# Altium PCB УШЯИ.411618.029Э.pcbdoc (part 3 of 6)
Units mil, origin at the board's own origin, x right, y up, seen from the top; angles counter-clockwise.
Board outline 13385.8 x 6692.9 mil, 4 copper layers (Top Layer, Supply, GND, Bottom Layer), stack 62.3 mil thick; 637 components, 474 nets, 1978 pads, 458 vias.
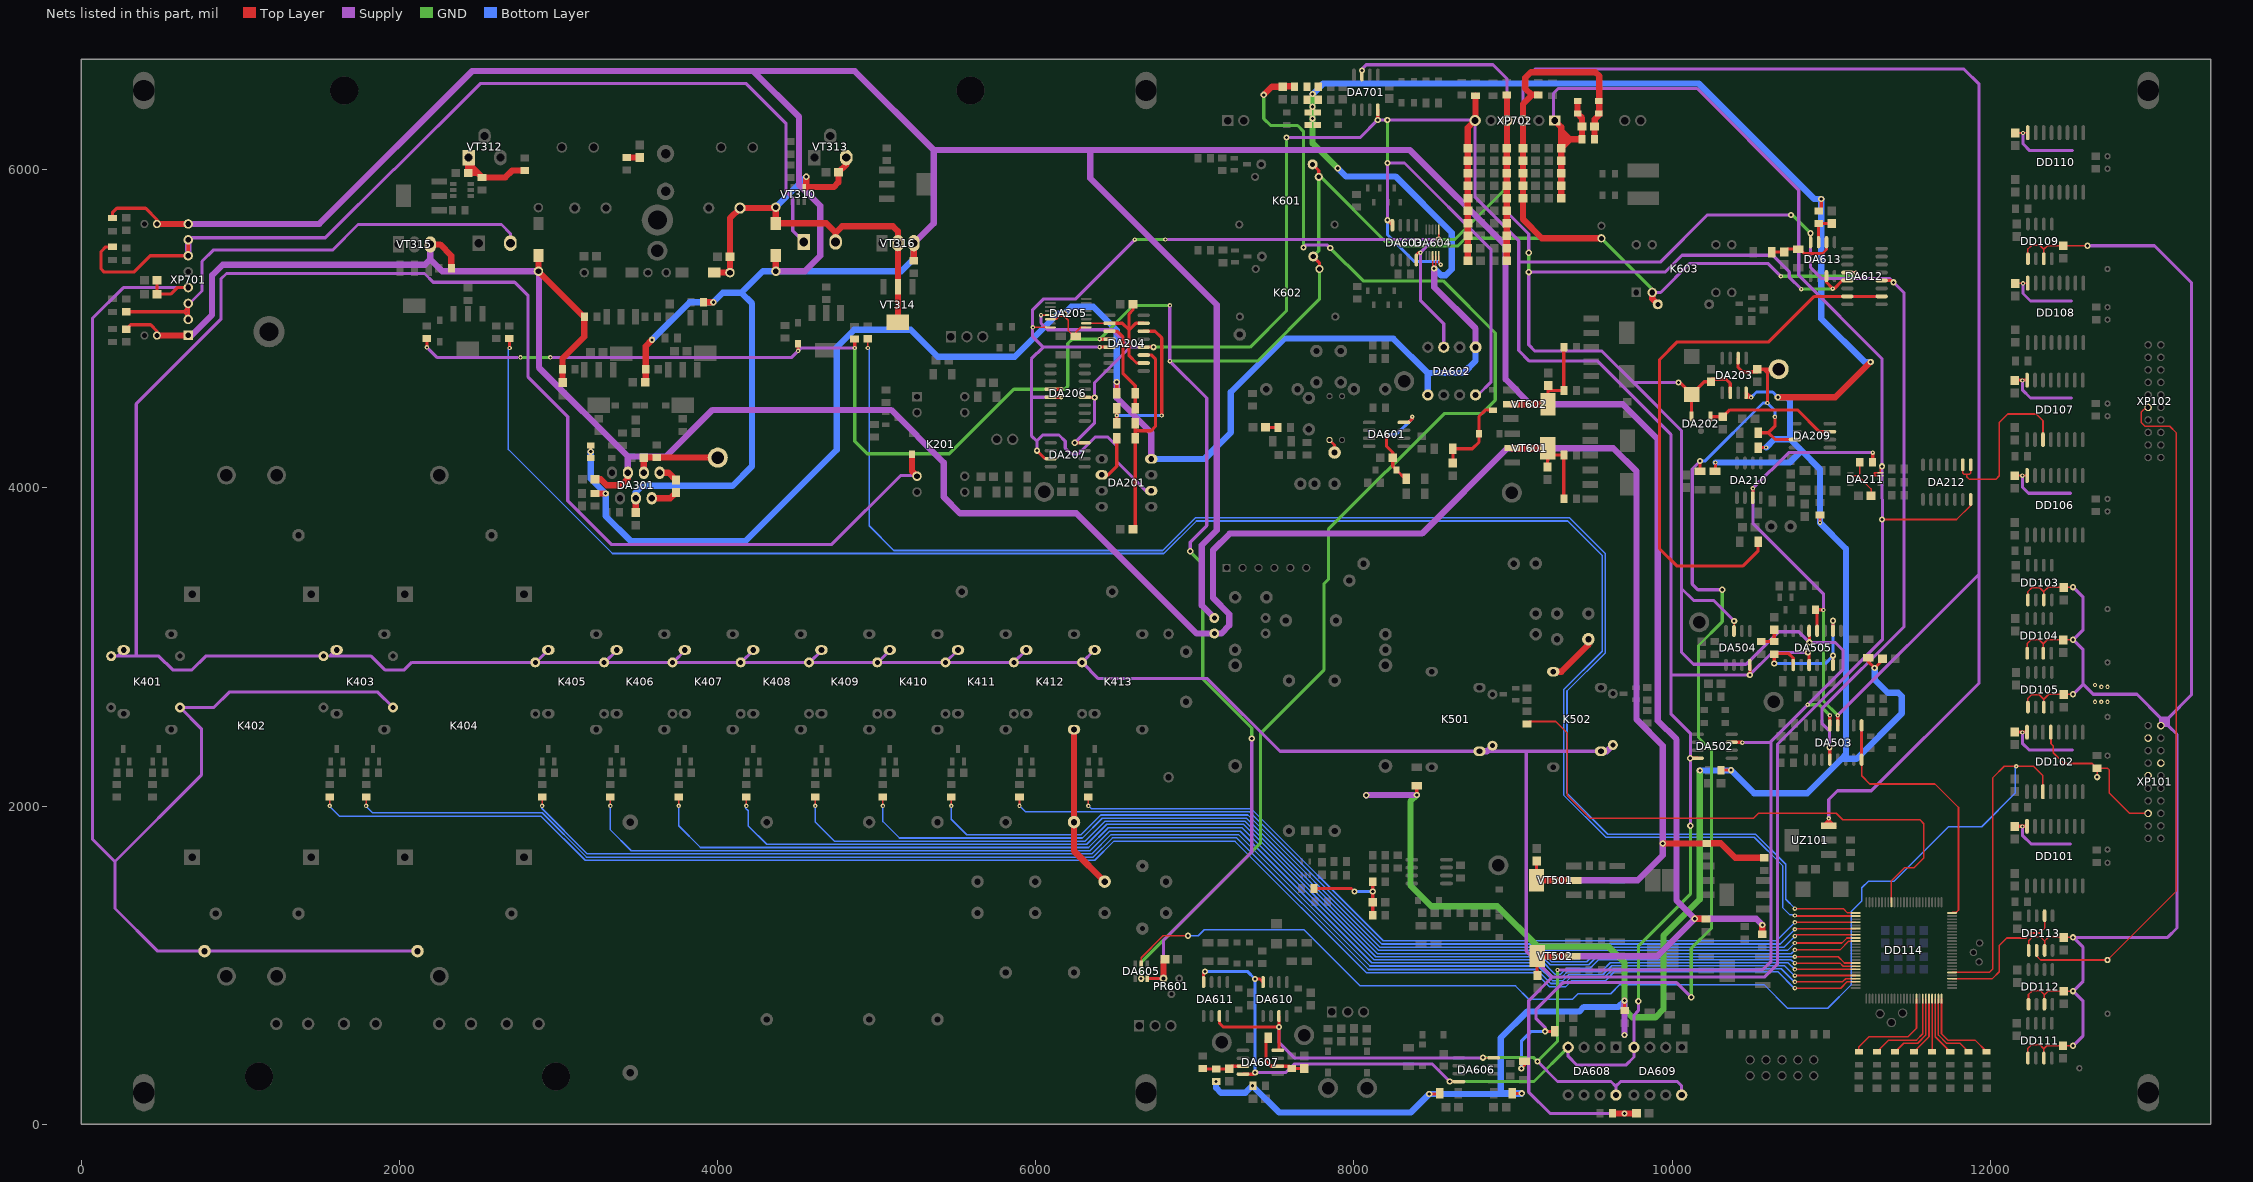
[diagram p5: the nets of this part, all layers, seen from the top]

## Footprints (in the part's own frame and the unit in brackets; to place one, negate y for a bottom-side part, rotate by r counter-clockwise, add the part's x,y. Pads: shape width x height; smd on the part's side, far side on the other; paste and mask are expansions set on the pad) (continued)
TQFP-100_L14.0-W14.0-P0.50-LS16.0-BL [mil]
  oval 11x63 smd paste+0 mask+2: 1(-236.2,-303.1) 2(-216.6,-303.1) 3(-196.9,-303.1) 4(-177.2,-303.1) 5(-157.5,-303.1) 6(-137.8,-303.1) 7(-118.1,-303.1) 8(-98.4,-303.1) 9(-78.8,-303.1) 10(-59.1,-303.1) 11(-39.4,-303.1) 12(-19.7,-303.1) 13(0,-303.1) 14(19.7,-303.1) 15(39.3,-303.1) 16(59,-303.1) 17(78.7,-303.1) 18(98.4,-303.1) 19(118.1,-303.1) 20(137.8,-303.1) 21(157.5,-303.1) 22(177.1,-303.1) 23(196.8,-303.1) 24(216.5,-303.1) 25(236.2,-303.1) 51(236.2,303.2) 52(216.5,303.2) 53(196.8,303.2) 54(177.1,303.2) 55(157.5,303.2) 56(137.8,303.2) 57(118.1,303.2) 58(98.4,303.2) 59(78.7,303.2) 60(59,303.2) 61(39.3,303.2) 62(19.7,303.2) 63(0,303.2) 64(-19.7,303.2) 65(-39.4,303.2) 66(-59.1,303.2) 67(-78.8,303.2) 68(-98.4,303.2) 69(-118.1,303.2) 70(-137.8,303.2) 71(-157.5,303.2) 72(-177.2,303.2) 73(-196.9,303.2) 74(-216.6,303.2) 75(-236.2,303.2)
  oval 63x11 smd paste+0 mask+2: 26(303.1,-236.2) 27(303.1,-216.5) 28(303.1,-196.8) 29(303.1,-177.1) 30(303.1,-157.5) 31(303.1,-137.8) 32(303.1,-118.1) 33(303.1,-98.4) 34(303.1,-78.7) 35(303.1,-59) 36(303.1,-39.3) 37(303.1,-19.7) 38(303.1,0) 39(303.1,19.7) 40(303.1,39.4) 41(303.1,59.1) 42(303.1,78.8) 43(303.1,98.4) 44(303.1,118.1) 45(303.1,137.8) 46(303.1,157.5) 47(303.1,177.2) 48(303.1,196.9) 49(303.1,216.6) 50(303.1,236.2) 76(-303.2,236.2) 77(-303.2,216.6) 78(-303.2,196.9) 79(-303.2,177.2) 80(-303.2,157.5) 81(-303.2,137.8) 82(-303.2,118.1) 83(-303.2,98.4) 84(-303.2,78.8) 85(-303.2,59.1) 86(-303.2,39.4) 87(-303.2,19.7) 88(-303.2,0) 89(-303.2,-19.7) 90(-303.2,-39.3) 91(-303.2,-59) 92(-303.2,-78.7) 93(-303.2,-98.4) 94(-303.2,-118.1) 95(-303.2,-137.8) 96(-303.2,-157.5) 97(-303.2,-177.1) 98(-303.2,-196.8) 99(-303.2,-216.5) 100(-303.2,-236.2)
  silkscreen extent -279,-350 279,279
TSSOP-16_L5.0-W4.4-P0.65-LS6.4-BL [mil]
  oval 13.5x68.2 smd paste+0 mask+2: 1(-89.6,-112.8) 2(-64,-112.8) 3(-38.4,-112.8) 4(-12.8,-112.8) 5(12.8,-112.8) 6(38.4,-112.8) 7(64,-112.8) 8(89.6,-112.8) 9(89.6,112.8) 10(64,112.8) 11(38.4,112.8) 12(12.8,112.8) 13(-12.8,112.8) 14(-38.4,112.8) 15(-64,112.8) 16(-89.6,112.8)
  silkscreen extent -120,-119 101,70
"Конденсатор К10-17Б М47 X.X.xФ  NP0 5% [DIP 5мм]" [mm]
  round 2 hole 1 unplated paste-2539.97 mask+0.051: 1(-2.5,0) 2(2.5,0)
  silkscreen extent -2.5,-1.8 2.5,1.8
"Конденсатор К10-17Б М47 X.X.xФ  NP0 5% [DIP 8мм]" [mm]
  round 2 hole 1 unplated paste-2539.97 mask+0.051: 1(-4,0) 2(4,0)
  silkscreen extent -2.5,-1.8 2.5,1.8
"Реле герконовое DIP05-1A72-13L  [PCB]" [mm]
  round 1.303 hole 0.76 paste-2539.97 mask+0.051: 2(0,0) 6(10.16,0) 8(12.7,7.62) 14(-2.54,7.62)
  silkscreen extent -4.57,-1.2 14.73,7.06, body extent -4.57,-0.28 14.73,7.9, height 5.2
?#1 [mil]
  round 78.7 hole 39.4 paste-99999 mask+2: 1(-1417.3,295.3) 2(1196.9,-295.2) 11(-1181.1,-295.2) 12(-1181.1,225)
  round 118.1 hole 78.7 paste-99999 mask+2: 3(-1574.8,157.5) 4(1574.8,157.5) 5(-1574.8,-157.4) 6(1574.8,-157.4)
  rect 98.4x98.4 hole 47.2 paste-99999 mask+2: 7(-826.8,374) 8(-826.8,-374) 9(826.8,374) 10(826.8,-374)
  silkscreen extent -1505,-384 1505,384
?#2 [mil]
  round 78.7 hole 39.4 paste-99999 mask+2: 1(-1417.3,295.3) 2(1196.9,-170) 11(-1181.1,-295.2)
  round 118.1 hole 78.7 paste-99999 mask+2: 3(-1574.8,157.5) 4(1574.8,157.5)
  rect 98.4x98.4 hole 47.2 paste-99999 mask+2: 7(-826.8,374) 8(-826.8,-374) 9(826.8,374) 10(826.8,-374)
  silkscreen extent -1505,-384 1505,384
?#3 [mil]
  round 78.7 hole 39.4 paste-99999 mask+2: 1(-472.4,0) 2(472.5,0)
  silkscreen extent -425,-89 422,89
?#4 [mil]
  round 78.7 hole 39.4 paste-99999 mask+2: 1(-620.1,0) 2(620,0)
  silkscreen extent -570,-158 570,158
?#5 [mil]
  round 98.4 hole 47.2 paste-99999 mask+2: 1(-787.4,0) 2(787.4,0)
  silkscreen extent -725,-158 725,158
?#6 [mil]
  round 78.7 hole 39.4 paste-99999 mask+2: 1(-472.5,0) 2(472.4,0)
  silkscreen extent -425,-89 422,89

## Part data
C211: library part "Конденсатор SMD 47пФ 100В X7R 10% [0805]"
C505: library part "Конденсатор К10-17Б М47 10пФ  NP0 5% [DIP]"
C601: library part "Конденсатор SMD 6,8пФ 100В X7R 10% [0805]"
C602 C604 C605 C631: library part "Конденсатор SMD 10пФ 100В X7R 10% [0805]"
C606: library part "Конденсатор SMD 15пФ 100В X7R 10% [0805]"
C618: library part "Конденсатор SMD 9100пФ 100В X7R 10% [0805]"
C619: library part "Конденсатор SMD 240пФ 100В X7R 10% [0805]"
K201: library part "Реле герконовое SIL05-1A72-71L [PCB]"
K601: library part "Реле герконовое DIP05-1C90-51L [PCB]"
R128 R130 R132 R134 R136 R138 R140 R142 R144 R146 R148 R150 R152 R154 R156 R158 R160 R162: library part "Резистор 100Ом 0,125Вт 1% [DIP]"
R213: library part "Резистор 402Ом 0.25Вт 1% [1206]"
R505: library part "Резистор C2-29В-0,25 2.4кОм ±0,5% [DIP]"
R509 R510 R611 R612: library part "Резистор 150Ом 0,125Вт 1% [0805]"
R605: library part "Резистор 5,1кОм 0,125Вт 1% [0805]"
R606: library part "Резистор 301кОм 0.25Вт 1% [1206]"
R614: library part "Резистор 4,7кОм 0,125Вт 1% [0805]"

## Free pads (board coordinates)
  oval 133.9x236.2 hole 133.9 slot 236.2 at 90 deg paste-99999 mask+2: 1(393.7,198) 1(393.7,6497.2) 1(6692.9,198) 1(6692.9,6497.2) 1(12992.1,198) 1(12992.1,6497.2)
  round 177.2 hole 177.2 paste-99999 mask+2: 1(1118.1,300.4) 1(1653.5,6497.2) 1(2984.2,300.4) 1(5590.5,6497.2)
  round 196.9 hole 118.1 paste-99999 mask+2: 1(1181.1,4981.5)
  round 60 hole 36: 1(2874,5361.3) 1(2874,5761.3) 2(3162.2,5352.6) 3(3562.2,5352.6) 4(3677.9,5352.7) 5(4078,5352.6) 6(4366.6,5361.3) 7(4366.1,5763.8)
  round 78.7 hole 39.4: 1(7282.3,4963.4) 1(7663.4,4024.8)
  round 78.7 hole 39.4 paste-99999 mask+2: 1(7971,3416.9) 26(7752,4025.1)
  round 39.4 hole 19.7 paste-99999 mask+2: 3(12736.2,1725.9) 3(12736.2,6005.4) 4(12736.2,1643.2) 4(12736.2,5375.5) 5(12671.2,2181.5) 5(12736.2,6084.1) 6(12559,351.9) 6(12736.2,2316.4) 7(12736.2,694.4) 7(12736.2,3237.7) 8(12736.2,2560.5) 9(12736.2,1032.3) 9(12736.2,2903) 10(12736.2,3851.9) 11(12736.2,3930.6) 12(12736.2,4529) 13(12736.2,4450.3) 14(12736.2,5056.6) 14(12736.2,5135.3)
  round 47.2 hole 31.5 paste-99999 mask+2: 15(11933,1139) 16(11893.7,1079.9) 17(11929.1,1020.9)
  round 59.1 hole 43.3 paste-99999 mask+2: 20(11307.1,694.4) 21(11377.9,639.3) 24(11448.8,698.3)
  round 196.8 hole 118.1 paste-99999 mask+2: 25(3622,5682.6)

## Via types
v1: diameter 27.6, hole 11.8, Top Layer to Bottom Layer, 218 vias
v2: diameter 39.4, hole 19.7, Top Layer to Bottom Layer, 213 vias
v3: diameter 27.6, hole 12, Top Layer to Bottom Layer, 24 vias
v4: diameter 78.7, hole 39.4, Top Layer to Bottom Layer, 3 vias

## Nets (pads, with @x,y where several pads share a name; then routed paths per layer and width w, separated by ;. In a path a pad name is that pad's centre, name@x,y a point inside that pad or via, vN(x,y) a via of type N, cw(c..) or ccw(c..) an arc to the next point about the centre after c; other vN are vias at no path point)
0V: C517.2 DA201.4 DA203.4 DA205.1 DA205.14 DA602.1 DA602.5 DA604.3 DA604.4 R204.1 R206.1 R218.1 R220.1 R228.1 R302.1 R505.1 R519.1 R527.1 R624.1 R626.1 R630.2 R635.2 R637.2 R653.1 R711.1 R712.1 R713.2 R714.2 VD301.1 VD302.2 VD714.2 VD715.1 VD716.1 VD717.2 | length 31625.1
  Top Layer w10: DA205.14@6091.9,5059.8 6129.5,5059.8 6148.5,5078.8 6178.2,5078.8 6204.7,5052.4 6204.7,4989.4 6242.4,4951.7 R206.1@6251.9,4951.7 6251.9,4977.5 6283,5008.6 DA205.1@6317.5,5008.6 ; DA604.3@8494.1,5457.3 8494.1,5389 v2(8503.9,5379.1) 8512.9,5388.1 8512.9,5437.1 8513.8,5437.9 DA604.4@8513.8,5457.3
  Top Layer w19.7: VD302.2@3202.2,4187.9 VD301.1@3202.2,4266.6 ; R204.1@6508.7,4594.3 v2(6508.7,4665.1) ; v2(8394.8,2068.8) R505.1@8394.8,2127.9 ; v2(8473.3,190.2) 8536.3,190.2 R624.1@8540.2,194.1 ; R626.1@8995.2,194.1 v2(9054.3,194.1) ; R637.2@9701,713.8 v2(9701,776.8) ; R220.1@10269.6,4104.9 10271.7,4104.9 v1@10271.7,4159 ; R519.1@10307.1,2225.9 v2(10370.1,2225.6) ; DA203.4@10464.8,4568.4 v1@10496.1,4568.4 ; DA203.4@10464.8,4597.1 10467.5,4597.1 v1@10496.1,4568.5 ; R218.1@10540.6,4251.4 10540.6,4253.5 v1@10590.6,4253.5 ; R653.1@10921.3,5740.3 10937,5756 v2(10937,5815.1) ; v1@10929.2,3781 R228.1@10929.2,3828.3 ; R527.1@11232.3,2931.5 11232.3,2907.9 v2(11272.5,2867.6) 11322.9,2918 C517.2@11322.9,2926.7
  Top Layer w39.4: R302.1@3229.7,3963.8 v2(3296.6,3963.8) ; v2(10664.2,4568.9) 11025.2,4568.9 v2(11247.6,4791.3)
  Supply w39.4: v2(6508.7,4665.1) 6508.7,4564.9 6726.4,4347.2 DA201.4@6726.4,4181.3 ; v2(8077.1,2068.1) 8077.9,2068.8 v2(8394.8,2068.8) ; v2(8503.9,5379.1) 8503.9,5261.4 8764.2,5001.2 DA602.5@8764.2,4883.8 ; v2(9701,560.2) v2(9701,776.8)
  GND w39.4: v2@7740.1,6474.6 v2(7740.1,6394.9) v2(7740.1,6320.1) 7740.1,6166.5 v2(7898.4,6008.3) ; v2(8394.8,2068.8) 8354.7,2028.8 8354.7,1501.6 8485.8,1370.5 8900.8,1370.5 9154.3,1116.9 9599.2,1116.9 9701,1015.1 v2(9701,776.8) 9701,721 9749.2,672.8 9895.6,672.8 9944.9,722 9944.9,1183.9 10174,1413 v2(10174,2224)
  Bottom Layer w19.7: v1(10496,4568.4) 10529.6,4602 10631.1,4602 v2(10664.2,4568.9)
  Bottom Layer w39.4: v2(3203.1,4227.2) 3203.1,4057.3 v2(3296.6,3963.8) 3296.6,3822.2 3452.7,3666.1 4176.4,3666.1 4748.4,4238.2 4748.4,4883.5 4858.3,4993.3 5214.2,4993.3 5383.5,4824 5868.1,4824 6138.3,5094.2 v2(6179.6,5094.2) 6222.8,5137.4 6361.4,5137.4 6508.7,4990.1 v2(6508.7,4665.1) ; DA201.4@6726.4,4181.3 7060.4,4181.3 7226.4,4347.2 7226.4,4601.8 7562.8,4938.2 8247.6,4938.2 8464.2,4721.6 ; v2(7133.5,268.9) 7133.5,228.3 7163.8,198 7317.9,198 v2(7361.6,241.7) 7529.2,74 8357.1,74 v2(8473.3,190.2) 9050.3,190.2 v2(9054.3,194.1) 8921.8,194.1 8921.8,542.7 9087.4,708.3 9416.5,708.3 9445.4,737.2 9661.4,737.2 v2(9701,776.8) ; v2(7740.2,6474.6) 7806.7,6541.1 10166.3,6541.1 10892.3,5815.1 v2(10937,5815.1) 10937,5063.3 11209,4791.3 v2(11247.6,4791.3) ; v2(7898.4,6008.3) 7949.6,5957.1 8261,5957.1 8615.3,5602.7 8615.3,5373.6 8577.5,5335.8 8547.2,5335.8 v2(8503.9,5379.1) ; DA602.1@8464.2,4583.8 8464.2,4721.6 ; DA602.5@8764.2,4883.8 8764.2,4797.6 8688.2,4721.6 8464.2,4721.6 ; v2(10174,2224) 10368.5,2224 v2(10370.1,2225.6) 10514.9,2080.7 10848.8,2080.7 11065.7,2297.6 ; v1(10271.6,4159) 10739.6,4159 10813.5,4232.8 ; v1(10590.5,4253.4) 10642.6,4305.5 10740.9,4305.5 ; v2(10664.2,4568.9) 10665.3,4567.7 10721,4567.7 10740.9,4547.8 10740.1,4547 10740.1,4365 10740.9,4364.2 10740.9,4305.5 ; v2(11272.5,2867.6) 11272.5,2794.8 11355.9,2711.4 11420.8,2711.4 11442.6,2689.6 11442.6,2581.5 11158.8,2297.6 11065.7,2297.6 ; 10740.9,4305.5 10813.5,4232.9 10929.1,4117.3 v1(10929.1,3781) 11092.1,3618 11092.1,2324 11065.7,2297.6
0V1: C739.2 DA605.2 R714.1 | length 7947.3
  Top Layer w39.4: v2(7433.2,6470) 7484.3,6521.1 C739.2@7539.3,6521.1 ; C739.2@7551.2,6521.1 C739.2@7539.3,6521.1 ; R714.1@7626.1,6521.2 7610.3,6521.2 7608.1,6523.4 7541.5,6523.4 C739.2@7539.3,6521.1
  Supply w19.7: v2(7682.3,5510.6) 7696.8,5525.2 7832.7,5525.2 v2(7851.1,5506.8)
  GND w19.7: v2(6662.6,915.8) 6662.6,1017.4 7413.4,1768.1 7413.4,2456.7 7811,2854.3 7811,3395.3 7839.4,3423.6 7839.4,3738.6 8567.3,4466.5 8803.1,4466.5 8887.8,4551.2 8887.8,4973.2 8560.6,5300.4 8057.5,5300.4 v2(7851.1,5506.8) ; v2(7433.2,6470) 7433.2,6320.4 7476,6277.5 7645.7,6277.5 7682.3,6240.9 v2(7682.3,5510.6)
1K: DD114.85 R144.1 | length 7217.6
  Top Layer w10: v1(4614.2,2001.2) R144.1@4614.2,2056.3 ; v1@10771.7,1095.7 11055.2,1095.7 11110.6,1151.1 DD114.85@11153.6,1151.1
  Bottom Layer w10: v1(4614.2,2001.2) 4614.2,1899.8 4735.6,1778.3 6309.4,1778.3 6435.4,1904.3 7315.3,1904.3 8147.6,1072 9193.3,1072 9243.7,1021.7 9463.4,1021.7 9513.8,1072 10748,1072 v1@10771.7,1095.7
  other v1: 10771.6,1095.7
1M: DD114.81 R150.1 | length 5710.6
  Top Layer w10: v1@5897.7,2001.2 R150.1@5897.7,2056.3 ; v1@10771.7,1225.6 10775.8,1229.8 DD114.81@11153.6,1229.8
  Bottom Layer w10: v1@5897.7,2001.1 5935,1963.8 7343.7,1963.8 8174.4,1133.1 10679.1,1133.1 v1@10771.7,1225.6
  other v1: 10771.6,1225.6 5897.6,2001.2
1RI: DD114.98 R132.1 | length 10314.5
  Top Layer w10: v1(1563,2001.2) R132.1@1563,2056.3 ; v1@10771.7,855.5 11059,855.5 11098.7,895.2 DD114.98@11153.6,895.2
  Bottom Layer w10: v1(1563,2001.2) 1563,1997.3 1624,1936.2 2890.7,1936.2 3168.3,1658.7 6370.1,1658.7 6489,1777.6 7252.7,1777.6 8078.4,951.9 9140.6,951.9 9227.5,865 9332.3,865 9369.3,902 9580.7,902 9636.6,957.9 10665.4,957.9 10767.7,855.5 v1@10771.7,855.5
  other v1: 10771.6,855.5
1RU: DD114.97 R134.1 | length 10063.2
  Top Layer w10: v1@1791.4,2001.2 R134.1@1791.4,2056.3 ; v1@10771.7,894.9 11070.9,894.9 11090.9,914.9 DD114.97@11153.6,914.9
  Bottom Layer w10: v1@1791.4,2001.2 1791.4,1997.3 1830.8,1957.9 2897.6,1957.9 3176.4,1679.1 6361.4,1679.1 6481.9,1799.6 7264,1799.6 8090.9,972.7 9148.6,972.7 9237,884.3 9322.8,884.3 9360.5,921.9 9573.8,921.9 9629.5,977.6 10685.1,977.6 10767.7,894.9 v1@10771.7,894.9
  other v1: 10771.6,894.9 1791.3,2001.2
3/50V: DD113.6 DD114.29 | length 888.6
  Top Layer w10: DD114.29@11759.9,914.9 11760.6,915.6 12012.6,915.6 12055.2,958.2 12055.2,1123.6 12102.2,1170.6 12224.3,1170.6 12255.8,1201.9 12312,1201.9 12340.7,1230.6 DD113.6@12340.7,1310.8
3/50VN: DD113.2 pad.9@12736.2,1032.3 XP102.9 | length 4356.8
  Top Layer w10: DD113.2@12290.7,1097.8 12290.7,1057.4 12315.7,1032.4 12736.2,1032.4 13169.3,1465.5 13169.3,4345 13127,4387.3 12972.4,4387.3 12948.8,4410.9 12948.8,4476.3 12977.9,4505.4 XP102.9@12992.1,4505.4
4.096V: C205.1 DA203.6 DA209.3 KT201.1 R217.1 R219.1 R625.1 R631.1 | length 7171.4
  Top Layer w19.7: v2(9052.2,349.7) 9071.9,369.3 R625.1@9071.9,396.9 ; v2(9201.6,583.9) R631.1@9260.7,583.9 ; R219.1@10175.1,4104.9 v2(10175.1,4167.9) ; DA203.6@10414.8,4815.4 10414.8,4756 10441.1,4729.9 10535.6,4729.9 10535.6,4745.6 10574.8,4745.6 ; R217.1@10540.6,4345.9 10604.2,4345.9 ; v1@10598.6,4533 10598.6,4722 ; v1@10645.7,4446.1 10645.7,4387 10604.6,4345.9 10604.2,4345.9 ; KT201.1@10669.3,4745.6 10622,4745.6 10598.5,4722 10574.8,4745.6 ; KT201.1@10669.4,4745.6 10574.8,4745.6 ; DA209.3@10772.8,4303.3 10646.8,4303.3 10604.2,4345.9
  Supply w19.7: v2(9201.6,583.9) 9204.6,586.8 9204.6,602.6 9144.7,662.4 9144.7,722.1 9312.5,890 10028.2,890 v2(10120,798.1) ; v2(10175.1,4167.9) 10126,4118.7 10126,3394.9 10161.4,3359.4 v2(10314.9,3359.4)
  GND w19.7: v2(10120,798.1) 10120,1105.5 10248,1233.5 10248,2347.6 10165.3,2430.3 10165.3,3009 10314.9,3158.7 v2(10314.9,3359.4)
  Bottom Layer w19.7: v2(9052.2,349.7) 9052.2,521.9 9114.2,583.9 v2(9201.6,583.9) ; v2(10175.1,4167.9) 10205.5,4167.9 10570.6,4533 v1(10598.4,4533) 10645.6,4485.7 v1(10645.6,4446.1)
6V: C202.1 DA202.1 DA209.7 | length 826.2
  Top Layer w19.7: DA202.1@10240.2,4448.6 10242.4,4446.4 10318.8,4446.4 10362.3,4489.7 10787.4,4489.7 10923.8,4353.3 DA209.7@10991.1,4353.3
10K: DD114.84 R146.1 | length 6739.5
  Top Layer w10: v1(5039.4,2001.2) R146.1@5039.4,2056.3 ; v1@10771.7,1139 11066.9,1139 11098.7,1170.8 DD114.84@11153.6,1170.8
  Bottom Layer w10: v1(5039.4,2001.2) 5039.4,1902.9 5143.4,1798.8 6293.3,1798.8 6418.5,1924 7324.4,1924 8155.9,1092.5 10725.2,1092.5 v1@10771.7,1139
  other v1: 10771.6,1139
10M: DD114.79 R152.1 | length 5277.5
  Top Layer w10: v1(6330.7,2001.2) R152.1@6330.7,2056.3 ; v1@10771.7,1268.9 10771.9,1269.2 DD114.79@11153.6,1269.2
  Bottom Layer w10: v1(6330.7,2001.2) 6348,1983.9 7353.1,1983.9 8183.8,1153.1 10655.9,1153.1 v1@10771.7,1268.9
  other v1: 10771.6,1268.9
10RI: DD114.96 R136.1 | length 8943.8
  Top Layer w10: v1@2897.7,2001.2 R136.1@2897.7,2056.3 ; v1@10771.7,934.3 10772,934.6 DD114.96@11153.6,934.6
  Bottom Layer w10: v1@2897.7,2001.2 2894.9,1998.4 2894.9,1985.9 3181.6,1699.2 6351.3,1699.2 6472.6,1820.5 7274.8,1820.5 8100.9,994.3 9155.7,994.3 9247.2,902.8 9313.4,902.8 9350.4,939.8 9563.8,939.8 9619.7,995.7 10281.1,995.7 10281.5,996.1 10705.9,996.1 10767.7,934.3 v1@10771.7,934.3
  other v1: 10771.6,934.3 2897.6,2001.2
10RU: DD114.94 R138.1 | length 8576.7
  Top Layer w10: v1(3326.8,2001.2) R138.1@3326.8,2056.3 ; v1@10771.7,973.6 10771.9,973.9 DD114.94@11153.6,973.9
  Bottom Layer w10: v1(3326.8,2001.2) 3324.4,1998.8 3324.4,1852.4 3457.5,1719.3 6340.5,1719.3 6463,1841.7 7285.8,1841.7 8112.3,1015.2 9162.3,1015.2 9255.1,922.4 9305.5,922.4 9342.5,959.4 9555.5,959.4 9611.4,1015.4 10728.3,1015.4 10770.1,973.6 v1@10771.7,973.6
  other v1: 10771.6,973.6
10V: DA201.6 R201.2 | length 291.6
  Top Layer w19.7: DA201.6@6415.5,4081.3 6455.6,4081.3 6508.8,4134.5 R201.2@6508.8,4310.8
100K: DD114.83 R148.1 | length 6292.5
  Top Layer w10: v1(5468.5,2001.2) R148.1@5468.5,2056.3 ; v1@10771.7,1182.3 10779.8,1190.5 DD114.83@11153.6,1190.5
  Bottom Layer w10: v1(5468.5,2001.2) 5468.5,1917.1 5566.3,1819.3 6284.2,1819.3 6408.6,1943.7 7333.4,1943.7 8164.2,1113 10702.4,1113 v1@10771.7,1182.3
  other v1: 10771.6,1182.3
100RI: DD114.93 R140.1 | length 8121.2
  Top Layer w10: v1(3755.9,2001.2) R140.1@3755.9,2056.3 ; v1@10771.7,1013 11055,1013 11074.5,993.6 DD114.93@11153.6,993.6
  Bottom Layer w10: v1(3755.9,2001.2) 3756.3,2000.8 3756.3,1875.3 3892.2,1739.4 6331.9,1739.4 6455.9,1863.4 7296,1863.4 8126.2,1033.2 9173.8,1033.2 9264.2,942.9 9298.8,942.9 9335.4,979.5 9482.7,979.5 9536.4,1033.2 10746,1033.2 10751.7,1027.5 10755.2,1027.5 10769.7,1013 v1@10771.7,1013
  other v1: 10771.6,1013
100RU: DD114.92 R142.1 | length 7655.5
  Top Layer w10: v1(4181.1,2001.2) R142.1@4181.1,2056.3 ; v1@10771.7,1052.4 11043.3,1052.4 11082.4,1013.3 DD114.92@11153.6,1013.3
  Bottom Layer w10: v1(4181.1,2001.2) 4176.7,2001.2 4176.4,2000.9 4176.4,1986.7 4192.9,1970.2 4192.9,1875.1 4309,1759.1 6320.1,1759.1 6446.1,1885 7305.1,1885 8137.1,1053.1 9183.9,1053.1 9234.2,1002.8 9475.6,1002.8 9525.2,1052.4 v1@10771.7,1052.4
  other v1: 10771.6,1052.4
102: DD114.17 VD109.1 | length 625.7
  Top Layer w10: VD109.1@11173.3,456.2 11173.3,485.7 11236.3,548.7 11480.4,548.7 11535.5,603.9 DD114.17@11535.5,788.9
103: DD114.19 VD108.1 | length 554.3
  Top Layer w10: VD108.1@11287.5,456.2 11360.4,529.1 11535.5,529.1 11574.9,568.4 DD114.19@11574.9,788.9
104: DD114.20 VD107.1 | length 464.5
  Top Layer w10: VD107.1@11401.7,456.2 11454.8,509.4 11543.4,509.4 11594.6,560.6 DD114.20@11594.6,788.9
105: DD114.21 VD106.1 | length 377.7
  Top Layer w10: VD106.1@11519.7,456.2 VD106.1@11519.7,462.1 ; VD106.1@11519.8,456.2 11614.3,550.7 DD114.21@11614.3,788.9
106: DD114.22 VD105.1 | length 338.3
  Top Layer w10: VD105.1@11629.9,460.1 11633.9,456.2 DD114.22@11633.9,788.9
107: DD114.23 VD104.1 | length 371.8
  Top Layer w10: DD114.23@11653.6,788.9 11653.6,550.7 VD104.1@11748.1,456.2
108: DD114.24 VD103.1 | length 460.5
  Top Layer w10: DD114.24@11673.3,788.9 11673.3,560.6 11724.5,509.4 11809.1,509.4 VD103.1@11862.3,456.2
109: DD114.25 VD102.1 | length 550.4
  Top Layer w10: DD114.25@11693,788.9 11693,568.4 11732.4,529.1 11903.6,529.1 VD102.1@11976.5,456.2
(1V25): DA204.11 R203.1 R204.2 | length 579.8
  Top Layer w19.7: DA204.11@6463.3,4984.2 6511.6,4984.2 6547.4,4948.4 6547.4,4720.3 6625.3,4642.4 R203.1@6625.3,4499.8
(2V5): DA204.6 R202.1 R203.2 | length 995.9
  Top Layer w19.7: R202.1@6508.8,4405.3 6508.8,4454.3 R203.2@6508.8,4499.8 ; DA204.6@6678.7,4984.2 6749.3,4984.2 6791.5,4942.1 v1@6791.5,4454.3
  Bottom Layer w19.7: v1@6508.7,4454.3 6789.5,4454.3 v1@6791.3,4452.5
  other v1: 6508.7,4454.4 6791.3,4454.4
(5V): C201.1 DA204.3 R201.1 R202.2 | length 1317.9
  Top Layer w19.7: C201.1@6610.4,3739.9 6625.3,3754.8 6625.3,4358.4 ; R202.2@6625.3,4405.3 6625.3,4358.4 ; DA204.3@6678.7,4834.2 6728.7,4834.2 6752.1,4810.8 6752.1,4385.6 6724.9,4358.4 6625.3,4358.4
(/1.25): DA505.2 DA505.7 DA505.10 R530.1 | length 966.3
  Top Layer w19.7: v2(10641.7,2895.2) 10641.7,2953.9 10645.6,2957.9 10733,2957.9 10760.8,2930.1 DA505.2@10760.8,2885.9 ; DA505.7@11010.8,2885.9 v2(11010.8,2945) ; DA505.10@11010.8,3101.3 v2(11010.8,3164.3)
  Bottom Layer w19.7: v2(10641.7,2895.2) 10961,2895.2 v2(11010.8,2945) v2(11010.8,3164.3)
+3VN: C105.2 C107.2 C109.2 C117.2 C121.2 C123.2 C125.2 DD103.1 DD103.3 DD104.1 DD104.3 DD105.1 DD105.3 DD109.1 DD109.3 DD111.1 DD111.3 DD112.1 DD112.3 DD113.1 DD113.3 XP101.20 | length 11130.4
  Top Layer w10: DD104.1@12232,2960.2 12232,3021.4 12255.5,3044.9 12306.7,3044.9 12332,3019.5 ; DD111.1@12235.9,415.8 12235.9,477 12259.4,500.5 12310.6,500.5 12335.8,475.1 12354.3,493.6 v2(12519.7,493.6) ; DD105.1@12235.9,2621.6 12235.9,2677.3 12258.8,2700.1 12306.8,2700.1 12335.9,2671 ; DD103.1@12235.9,3295.3 12235.9,3347.7 12259.8,3371.5 12310.9,3371.5 12335.9,3346.6 DD103.3@12335.9,3295.3 ; DD109.1@12236.1,5439.6 12236.1,5500.8 12259.6,5524.3 12310.8,5524.3 12336.1,5498.9 ; DD112.1@12239.8,754.4 12239.8,815.6 12263.3,839.1 12314.5,839.1 12339.8,813.7 ; DD113.1@12240.7,1092.5 12240.7,1153.7 12264.2,1177.2 12315.4,1177.2 12340.6,1151.8 12363.5,1174.7 v2(12519.7,1174.7) ; DD104.3@12332,2960.2 12332,3019.5 ; DD111.3@12335.9,415.8 12335.9,475.1 ; DD105.3@12335.9,2621.6 12335.9,2671 ; DD103.3@12336,3295.2 12336,3348.1 12363.4,3375.5 v2@12519.8,3375.5 ; DD109.3@12336.1,5439.6 12336.1,5498.9 ; DD112.3@12339.8,754.4 12339.8,813.7 ; DD113.3@12340.7,1092.5 12340.7,1151.8 ; v2@12518.8,836.6 12362.6,836.6 12339.8,813.7 ; v2(12519.7,3044.8) 12357.3,3044.8 12332,3019.5 ; v2@12519.8,2702.3 12367.2,2702.3 12335.9,2671 ; v2@12610.2,5521.1 12456.7,5521.1 12358.3,5521.1 12336.1,5498.9
  Supply w19.7: v2(12519.7,493.6) 12582.7,556.6 12582.7,773.6 v2(12519.7,836.6) 12582.7,899.6 12582.7,1111.7 v2(12519.7,1174.7) 13114.2,1174.7 13173.2,1233.8 13173.2,2450.3 13118.1,2505.4 ; v2(12519.7,2702.3) 12582.7,2765.3 ; v2(12519.7,3044.8) v2@12519.9,3045 ; v2@12519.7,3045.3 v2@12519.9,3045 ; v2(12519.7,3375.5) 12582.7,3312.5 12582.7,3107.8 v2@12519.9,3045 ; v2(12610.2,5521.2) 13031.5,5521.2 13263.8,5288.9 13263.8,2698.3 13118.1,2552.6 ; 13094.9,2529.5 13070.9,2552.7 ; v2@12519.9,3045 12582.7,2982.3 12582.7,2765.3 ; 12582.7,2765.3 12645.7,2702.3 12921.2,2702.3 13070.9,2552.7 ; XP101.20@13070.9,2505.4 13118.1,2505.4 ; XP101.20@13070.9,2505.4 13070.9,2552.7 ; XP101.20@13070.9,2505.4 13094.7,2529.1 ; 13070.9,2552.7 13118.1,2552.7 13118.1,2552.6 ; 13094.7,2529.1 13118.1,2552.6 ; 13094.7,2529.1 13118.1,2505.4 ; 13118.1,2505.4 13118.1,2552.6
+5: C613.1 C705.2 C711.2 C712.2 C713.2 C714.2 C715.2 C716.1 DA204.12 DA206.12 DA210.3 DA503.12 DA505.12 DA605.3 DA612.12 K601.2 K602.2 K603.2 PR601.3 R229.1 R313.1 R318.1 R531.1 R705.1 R708.1 UZ101.3 VD126.1 VD127.1 VD128.1 VD306.2 VD708.1 VD709.2 XP702.3 | length 32246.1
  Top Layer w10: v1@10984.3,1922.8 UZ101.3@10984.6,1876.3
  Top Layer w19.7: R313.1@2171.4,4938.5 2173.2,4936.6 v3(2173.2,4883.1) ; v3(4506.8,4860.9) VD306.2@4506.8,4904.2 ; R318.1@4861.1,4935.7 4862.2,4934.7 v3(4862.2,4879.1) ; DA206.12@6093.1,4619.3 v3(6160,4619.3) ; v1@6401.7,4934.2 DA204.12@6463.3,4934.2 ; DA605.3@6700,916.3 6802.8,916.3 PR601.3@6802.9,916.1 ; VD126.1@7740.2,6033 7778.7,5994.4 K601.2@7778.7,5954.6 ; VD127.1@7744.1,5454.3 7782.7,5415.7 K602.2@7782.7,5375.9 ; DA210.3@10507.2,3937.5 v3(10507.2,3996.6) ; R531.1@10901.6,3233.8 10948.8,3233.8 v3(10950.2,3232.4) 10910.9,3232.4 DA505.12@10910.9,3101.3 ; UZ101.3@10984.6,1876.3 10949.7,1876.3 10984.3,1910.9 10984.3,1922.8 10985.5,1909.8 11023,1872.3 UZ101.3@10985.2,1872.3 ; DA503.12@11040.7,2506.8 v3(11040.7,2569.8) ; DA612.12@11100.9,5353.2 11151.8,5353.2 v3(11153.5,5351.6) ; R229.1@11257.9,4161.7 11260.7,4164.6 v3(11260.7,4221.4)
  Top Layer w39.4: PR601.3@6802.9,916.1 6802.9,1022.4 C613.1@6816.7,1036.2 ; R705.1@9157.5,6470 9121.3,6470 ; R708.1@9511.9,6190.5 9511.9,6270.8 9513.7,6272.6 9513.7,6317.3 9541.3,6344.9 9541.3,6589 9517.6,6612.6 9112.1,6612.6 9076.7,6577.2 9076.7,6509.4 9116.1,6470 9121.3,6470 ; C716.1@9555.2,5568.4 9181.1,5568.4 9063,5686.5 C711.2@9063,5820.4 C712.2@9063,5899.1 C713.2@9063,5977.8 C714.2@9063,6056.6 9063.1,6135.3 9061.9,6136.5 9061.9,6308.6 9061.9,6410.6 9121.3,6470 ; K603.2@9874.8,5228 9874.8,5188.3 VD128.1@9909.4,5153.6
  Supply w19.7: v3(2173.2,4883.1) 2236.2,4820.1 2743.7,4820.1 ; v3(2948.8,4820.1) 4466,4820.1 v3(4506.8,4860.9) 4525,4879.1 v3(4862.2,4879.1) ; PR601.3@6802.9,916.1 6802.9,1156.1 7357.9,1711 v2(7357.9,2424.8) ; v3(6842.5,5146.8) v3(6842.5,4796.4) 7074.8,4564.2 7074.8,3762.2 6970.7,3658.1 v2(6970.7,3601) ; XP702.3@9061.9,6308.6 9061.9,6555.4 9137.8,6631.4 11834.6,6631.4 11929.1,6536.9 11929.1,3457.8 ; K603.2@9874.8,5228 9927.6,5228 10108.4,5408.8 10604.2,5408.8 v3(10683.2,5329.7) ; v3(10950.2,3232.4) 10950.2,3334.4 10507.2,3777.4 v3(10507.2,3996.6) 10732,4221.4 v3(11260.7,4221.4) ; v1@10984.2,1922.8 10984.2,2040.8 11039.4,2096 11251.9,2096 11929.1,2773.1 11929.1,3457.8 ; v3(11040.7,2569.8) 11929,3458 11929.1,3457.8
  GND w19.7: v3(2761.4,4819.7) 2948.4,4819.7 v3(2948.8,4820.1) ; v3(4862.2,4879.1) 4862.2,4292.5 4940.9,4213.8 5456.7,4213.8 5862.2,4619.3 v3(6160,4619.3) 6181.1,4619.3 6200.8,4639 6200.8,4906.7 6228.3,4934.2 v1(6401.6,4934.2) 6614.2,5146.8 v3(6842.5,5146.8) ; v3(6842.5,4796.4) 7393.7,4796.4 7782.7,5185.4 K602.2@7782.7,5375.9 ; v2(6970.7,3601) 6970.7,3597.4 7049.6,3518.5 7049.6,2798.6 7357.9,2490.3 v2(7357.9,2424.8) ; VD127.1@7744.1,5454.2 7778.7,5488.9 K601.2@7778.7,5948.6 ; K601.2@7778.7,5954.6 K601.2@7778.7,5948.6 ; K603.2@9874.8,5228 9874.8,5248.7 C716.1@9555.1,5568.4 8701.1,5568.4 8653.5,5520.9 8295.3,5520.9 8267.7,5548.4 8196.6,5548.4 7796.4,5948.6 K601.2@7778.7,5948.6 ; v3(10683.2,5329.7) 11131.7,5329.7 v3(11153.5,5351.6) ; v3(10950.2,3232.4) 10950.2,2660.3 v3(11040.7,2569.8)
  other v1: 10984.2,1922.7
+5R: C622.2 C705.1 C706.2 C707.2 C708.2 C709.2 C710.2 DA211.9 DA211.10 DA212.14 K201.3 K401.2 K403.2 K405.2 K406.2 K407.2 K408.2 K409.2 K410.2 K411.2 K412.2 K413.2 K501.2 K502.2 R646.2 R708.2 VD110.1 VD111.1 VD113.1 VD115.1 VD116.1 VD117.1 VD118.1 VD119.1 VD120.1 VD121.1 VD122.1 VD123.1 VD124.1 VD125.1 VD708.2 VD709.1 XP702.1 | length 33775.1
  Top Layer w10: DA211.9@11309,4075.1 11271.6,4075.1 11271.6,4094.8 DA211.10@11309,4094.8 11309,4123 v2@11320.9,4134.8 ; v2@11317.3,3800.7 11787.7,3800.7 11876.4,3889.4 DA212.14@11876.4,3926.7
  Top Layer w39.4: VD110.1@5222.5,4210.2 5222.5,4104.3 K201.3@5253.6,4073.2 ; XP702.1@9261.9,6308.6 9303.2,6267.2 9303.2,6245.5 ; 9303.1,6245.6 9303.1,6267.2 ; C706.2@9303.2,5820.4 9303.2,5899.1 9303.2,5977.8 9303.2,6056.6 C710.2@9303.2,6135.3 ; VD708.2@9405.6,6430.6 9405.6,6351.9 9433.2,6324.3 9433.2,6190.5 9358.4,6190.5 C710.2@9303.2,6135.3 ; R646.2@9626.2,68.1 v2(9700.8,68.1) C622.2@9775.8,68.1 ; C710.2@9303.2,6135.3 9303.2,6191.6 ; 9303.2,6191.6 9303.2,6245.5 ; 9303.2,6191.6 9357.1,6191.6 9303.2,6245.5
  Supply w19.7: VD111.1@189,2942.1 228.8,2942.1 ; K401.2@267.3,2980.7 228.8,2942.1 ; VD113.1@1523.6,2942.1 783.5,2942.1 696.9,2855.5 574.9,2855.5 488.3,2942.1 346.2,2942.1 ; K403.2@1602,2980.7 1601.5,2980.7 1563,2942.1 1822.8,2942.1 1909.4,2855.5 2031.5,2855.5 2078.7,2902.8 VD115.1@2854.3,2902.8 VD116.1@3287.4,2902.8 ; VD115.1@2854.4,2902.8 2858.7,2902.8 K405.2@2936.6,2980.7 ; K406.2@3369.7,2980.7 3291.7,2902.8 VD116.1@3287.4,2902.8 ; VD117.1@3716.6,2902.8 3720.8,2902.8 K407.2@3798.8,2980.7 ; K408.2@4227.9,2980.7 4150,2902.8 VD118.1@4145.7,2902.8 ; K409.2@4657.1,2980.7 4579.1,2902.8 VD119.1@4574.8,2902.8 ; VD120.1@5004,2902.8 5008.2,2902.8 K410.2@5086.2,2980.7 ; K201.3@5253.6,4073.2 5248.4,4078.3 5152.7,4078.3 4718.9,3644.5 3332.3,3644.5 3058.3,3918.5 3058.3,4446.8 2809.4,4695.7 2809.4,5207.1 2724.4,5292.1 2213,5292.1 2157.9,5347.2 913.4,5347.2 878.3,5312.2 878.3,5059.8 346.2,4527.7 346.2,2942.1 ; K411.2@5519.3,2980.7 5511.1,2980.7 VD121.1@5433.1,2902.8 ; K412.2@5944.5,2980.7 5940.2,2980.7 VD122.1@5862.2,2902.8 ; VD123.1@6291.4,2902.8 6369.3,2980.7 K413.2@6373.6,2980.7 ; K501.2@8788.9,2344.4 7534.7,2344.4 7078.7,2800.4 6393.7,2800.4 VD123.1@6291.3,2902.8 VD122.1@5862.2,2902.8 ; 8836.5,2344.4 K502.2@9552.6,2344.4 9082.7,2344.4 9082.7,1087.8 9244.1,926.4 ; XP702.1@9261.8,6308.6 9257.9,6308.6 9253.9,6312.5 9253.9,6479.5 9284.2,6509.8 10156.7,6509.8 10795.3,5871.2 10795.3,5335.8 11318.9,4812.2 11322.8,3048.4 10661.4,2387 10661.4,1005.1 10582.7,926.4 9244.1,926.4 ; v2(9700.8,68.1) 9232.3,68.1 9098.4,202 9098.4,776.8 9244.1,922.4 9244.1,926.4 ; 228.8,2942.1 346.2,2942.1 ; VD116.1@3287.4,2902.8 VD117.1@3716.5,2902.8 VD118.1@4145.7,2902.8 ; VD118.1@4145.7,2902.8 VD119.1@4574.8,2902.8 ; VD119.1@4574.8,2902.8 VD120.1@5003.9,2902.8 VD121.1@5433.1,2902.8 ; VD121.1@5433.1,2902.8 VD122.1@5862.2,2902.8
  Supply w39.4: K501.2@8788.9,2344.4 8836.5,2344.4 VD124.1@8871.2,2379 ; K502.2@9552.6,2344.4 9588.5,2344.4 VD125.1@9627.1,2383
  other v2: 11318.9,3800.7 11318.9,4134.8
+5VN: C101.2 C103.2 C111.2 C113.2 C115.2 C119.2 DD101.16 DD102.16 DD106.16 DD107.16 DD108.16 DD110.16 XP101.11 XP101.14 XP101.17 | length 3074.2
  Top Layer w10: C101.2@12153.6,1871.6 DD101.16@12230.2,1872.6 ; C103.2@12153.6,2466.1 12154.6,2465.1 12157.5,2462.1 v1@12200.9,2462.1 ; v1@12200.9,4076.3 12153.6,4076.3 12154.7,4077.4 DD106.16@12230.7,4077.4 ; v1@12204.8,5284.9 C115.2@12157.5,5284.9 12159.5,5286.9 DD108.16@12234.5,5286.9 ; v1@12204.8,6229.8 C119.2@12157.5,6229.8 12159.5,6231.8 DD110.16@12234.5,6231.8
  Top Layer w19.7: C101.2@12153.6,1871.6 12154.6,1872.6 DD101.16@12230.2,1872.6 ; C103.2@12153.6,2465.1 12154.6,2465.1 DD102.16@12230.2,2464.1 ; C113.2@12153.6,4674.7 12155.6,4676.7 DD107.16@12230.6,4676.7
  Supply w19.7: v1(12200.8,1871.6) 12200.8,1816.1 12255.9,1761 12504.2,1761 ; v1(12200.8,2462.1) 12200.8,2394.9 12243.7,2351.9 12515.7,2351.9 ; v1(12200.8,4076.3) 12200.8,4005.1 12239.8,3966.1 12503.9,3966 ; v1(12200.8,4674.7) 12200.8,4615.6 12252,4564.5 12507.9,4564.5 ; v1(12204.7,5284.9) 12204.8,5221.5 12252.1,5174.4 12508.1,5174.4 ; v1(12204.7,6229.8) 12204.7,6161.9 12247,6119.6 12515.7,6119.6
  other v1: 12657.5,2654.7 12696.8,2654.7 12736.2,2654.7 12697.2,2749.2 12736.2,2749.2 12657.5,2761
+12: R702.1 VD308.3 XP701.2 XP701.3 | length 3019.9
  Top Layer w19.7: R702.1@283.3,5107 646.3,5107 ; 646.3,5107 673.2,5134 673.2,5079.9 646.3,5107
  Supply w19.7: XP701.2@673.2,5058.6 673.2,5150.8 674.9,5152.4 759.8,5237.4 759.8,5423.2 830.7,5494.1 1579.5,5494.1 1740.2,5654.7 2641.7,5654.7 2698.4,5598 VD308.3@2698.4,5537.7
  Supply w39.4: XP701.3@667.1,5152.4 XP701.3@674.9,5152.4
+12R: C703.2 C704.2 K402.1 K404.1 VD112.1 VD114.1 XP701.4 | length 9433.2
  Top Layer w19.7: C703.2@476.3,5303.8 476.3,5217.2 562.5,5217.2 603.9,5258.6 XP701.4@673.3,5258.6
  Supply w19.7: XP701.4@673.3,5258.6 265.3,5258.6 70.9,5064.2 70.9,1792.5 212.6,1650.8 ; VD114.1@1960.6,2619.3 1862.2,2717.7 933.1,2717.7 834.6,2619.3 622.1,2619.3 755.9,2485.4 755.9,2194.1 212.9,1651 ; K404.1@2114.2,1087.8 K402.1@775.6,1087.8 480.7,1087.8 212.6,1355.9 212.6,1650.8 ; 212.6,1650.8 212.9,1651 ; 212.6,1650.8 212.9,1650.5 212.9,1651
+15: C203.1 C204.1 C717.2 C718.2 C719.2 C720.2 C721.2 C722.2 C723.2 C724.2 C725.2 C726.2 DA201.2 DA202.3 DA203.2 DA204.13 DA205.16 DA206.13 DA207.7 DA502.7 DA503.13 DA504.7 DA505.13 DA602.7 DA603.8 DA604.6 DA606.8 DA607.8 DA608.8 DA609.8 DA610.7 DA611.7 DA612.13 DA613.7 DA701.7 R706.1 XP702.4 | length 26942.2
  Top Layer w10: v3(5981.7,5008.6) DA205.16@6091.9,5008.6 ; DA604.6@8533.5,5623.2 8533.7,5623 v2(8533.7,5560.8) ; v2(8811,418.5) 8877,418.5 DA606.8@8877.9,417.6 ; DA504.7@10388.4,3100.1 10389.7,3101.5 v2(10389.7,3162.6)
  Top Layer w19.7: v2(6007.9,4233.5) 6057.9,4183.4 DA207.7@6094.3,4183.4 ; DA206.13@6093.1,4569.3 v3(6160,4569.3) ; v1@6401.7,4884.2 DA204.13@6463.3,4884.2 ; DA611.7@7154.5,680.6 7154.5,634.9 7178.1,611.3 v2(7528.5,611.3) ; DA607.8@7520.9,464.6 7528.5,472.2 v2(7528.5,611.3) ; DA610.7@7528.5,680.3 v2(7528.5,611.3) ; DA603.8@8393.7,5448.1 8393.7,5465.7 8405.5,5477.5 v1(8417.3,5477.5) ; v2(10039.4,4662.6) 10046.6,4662.6 C203.1@10122,4587.2 ; DA202.3@10122.1,4448.6 10122.1,4587.2 10201.7,4666.9 10244.1,4666.9 10244.1,4682.6 10338.6,4682.6 10364.8,4656.4 DA203.2@10364.8,4597.1 ; DA502.7@10374.2,2400.5 10439.2,2400.5 v3(10440.9,2398.8) ; DA505.13@10860.8,3101.3 10862.2,3099.9 v2(10862.2,3028.7) ; DA613.7@10969.9,5330.6 10969.9,5291.2 v3(11009.2,5251.9) 11018.4,5251.9 11069.8,5303.2 DA612.13@11100.9,5303.2 ; DA503.13@10990.7,2506.8 v3(10990.7,2569.8)
  Top Layer w39.4: C726.2@8960.7,5426.7 8960.7,5505.4 8960.7,5584.1 8960.7,5662.9 8960.7,5741.6 8960.7,5820.4 8960.7,5899.1 8960.7,5977.8 8960.7,6056.6 8960.7,6135.3 8961.9,6136.5 8961.9,6308.6 8961.9,6468.8 R706.1@8960.7,6470
  Supply w19.7: v2(6007.9,4233.5) 6007.9,4292.5 ; v3(6160,4569.3) 5976.5,4569.3 5972.4,4565.2 ; v1(6401.6,4884.2) 6046.1,4884.2 ; v3(6622,5560.2) 6248,5186.2 6047.2,5186.2 5980.3,5119.3 5980.3,4950 6046.1,4884.2 ; DA201.2@6726.4,3981.3 6714.8,3969.7 6704.7,3969.7 6507.9,4166.5 6507.9,4262.8 6450.6,4320.1 6375.3,4320.1 6269,4213.8 6220.5,4213.8 6185,4249.2 6185,4292.5 6145.7,4331.9 6043.3,4331.9 6007.9,4296.4 6007.9,4292.5 ; v3(6814.9,5560.8) 8500.5,5560.8 ; v2@7527.2,611.4 7528.3,610.2 7528.3,514.2 7625.2,417.3 8809.8,417.3 v2(8811,418.5) ; v2(8049.9,6623.6) 8049.9,6631.8 8077.1,6659 8873.9,6658.8 8961.8,6570.9 XP702.4@8961.8,6308.6 8961.8,5732.3 9098.4,5595.7 v2(9098.4,5477.5) ; v2(8533.7,5560.8) 8500.5,5560.8 ; DA602.7@8564.2,4883.8 8564.2,5031.5 8417.3,5178.3 v1(8417.3,5477.5) 8500.5,5560.8 ; v2(9153.5,394.9) 9279.5,268.9 9615.4,268.9 9646.3,238 ; v3(9279.5,969.7) 10566.9,969.7 10622,1024.8 10622,2406.7 ; DA608.8@9646.3,183.5 9646.3,238 ; v2(10039.4,4662.6) 9755.9,4662.6 ; DA609.8@10059.7,183.5 10059.7,240.7 10031.5,268.9 9677.1,268.9 9646.3,238 ; v2(10389.7,3162.6) 10259.8,3292.5 10133.8,3292.5 10059,3367.3 ; v3(10440.9,2398.8) 10614.2,2398.8 10622,2406.7 ; v3(10811,5249.2) 10736.2,5324 10736.2,5357.5 10631.8,5461.9 10061.4,5461.9 9955.1,5355.5 v2(9098.4,5355.5) 9098.4,4898.8 9137.8,4859.4 9559,4859.4 9755.9,4662.6 ; 5972.4,4565.2 5972.4,4810.6 6046.1,4884.2 ; 5972.4,4565.2 5972.4,4327.9 6007.9,4292.5 ; 9755.9,4662.6 10059,4359.4 10059,3367.3 ; 10059,3367.3 10059,2965.7 10133.8,2890.9 10464.5,2890.9 10669.3,3095.7 10795.3,3095.7 v2(10862.2,3028.7) 11023.6,3028.7 11074.8,2977.6 11074.8,2859.4 v3(10851.8,2636.4) 10622,2406.7
  GND w19.7: v3(6622,5560.2) 6622.6,5560.8 v3(6814.9,5560.8) ; v2(8533.7,5560.8) 8634.4,5560.8 8961.8,5888.2 XP702.4@8961.8,6308.6 ; v2(8811,418.5) 9129.9,418.5 v2(9153.5,394.9) 9279.5,520.9 v3(9279.5,969.7) ; v2(9098.4,5355.5) v2(9098.4,5477.5) ; v3(10811,5249.2) 11006.6,5249.2 v3(11009.2,5251.9) ; v3(10851.8,2636.4) 10924.1,2636.4 v3(10990.7,2569.8)
+55: C304.2 C308.1 C508.1 C607.1 C701.1 DA301.3 pad.1@2874,5361.3 R305.1 R306.1 R330.2 R513.2 R514.2 R615.2 R616.2 R701.1 VD307.1 VD501.1 VT315.3 VT501.2 VT501.4 VT601.2 VT601.4 XP701.1 | length 19170.7
  Top Layer w19.7: R701.1@283.3,4996.7 311.4,5024.8 437.1,5024.8 476.3,4985.6 C701.1@476.3,4957.4 ; VT501.4@9146.9,1533 9146.9,1652.3 C508.1@9149.6,1655.1 ; C607.1@9216.6,4131.4 9218,4206.2 R615.2@9318.9,4206.2 R616.2@9318.9,3930.6
  Top Layer w39.4: C701.1@476.3,4957.4 672.1,4957.4 XP701.1@673.3,4958.6 ; VT315.3@2194.6,5529.6 2256.2,5529.6 2326.8,5459 R330.2@2326.8,5380.2 ; pad.1@2874,5361.3 VD307.1@2874,5460.3 ; pad.1@2874.1,5361.3 3159.7,5075.7 3162.8,5075.7 3162.8,4949.7 3025,4811.9 3025,4745 C308.1@3025.8,4662.9 ; C304.2@3230.5,4053.2 3266.5,4053.2 3302.9,4016.7 3394.3,4016.7 3437.8,4060.2 3437.8,4093.9 DA301.3@3436.4,4095.3 ; VT601.2@8994.7,4249.5 8995,4249.2 v2(9106.3,4249.2) 9217.6,4249.2 VT601.4@9217.9,4249.5 ; VT501.4@9146.8,1533 v2(9265.3,1533) VT501.2@9380.7,1533 ; v2(9940.9,1765) 10216.2,1765 R513.2@10216.5,1765.3 10305.2,1765.3 10395.7,1674.7 R514.2@10578.7,1674.7
  Supply w39.4: XP701.1@673.2,4958.6 695.1,4958.6 823.2,5086.6 823.2,5336.6 889.4,5402.7 2160.7,5402.7 2194.5,5436.6 ; VT315.3@2194.5,5529.6 2194.5,5436.6 ; DA301.3@3436.4,4095.3 3436.4,4197.4 ; v2(9265.3,1533) 9783.8,1533 9940.9,1690.2 v2(9940.9,1765) 9940.9,2379.1 9775.6,2544.5 9775.6,4103.5 9629.9,4249.2 v2(9106.3,4249.2) 8964.5,4249.2 8427.6,3712.3 7219,3712.3 7114.2,3607.5 7114.2,3308.3 7216.5,3205.9 7216.5,3135 7165.3,3083.9 VD501.1@7122,3083.9 7010.7,3083.9 6254.8,3839.8 5523.6,3839.8 5421.2,3942.1 5421.2,4158.7 5090.5,4489.4 3968.5,4489.4 3676.6,4197.4 3436.4,4197.4 ; 2194.5,5436.6 2269.8,5361.3 pad.1@2874,5361.3 2877.9,5357.4 2877.9,4755.9 3436.4,4197.4
+U: DD114.77 R311.1 | length 11932.4
  Top Layer w10: v1@10771.7,1312.2 10775.3,1308.6 DD114.77@11153.6,1308.6
  Top Layer w19.7: R311.1@2691.1,4938.5 2692.9,4936.6 v1(2692.9,4879.1)
  Bottom Layer w10: v1(2692.9,4879.1) 2685.8,4872 2685.8,4240.5 3339.4,3587 6805.1,3587 7009.8,3791.7 9343.3,3791.7 9559.8,3575.2 9559.8,2972.9 9317.3,2730.4 9317.3,2069.6 9583.7,1803.3 10516.4,1803.3 10693.7,1625.9 10693.7,1362.8 10741.1,1315.4 10768.5,1315.4 v1(10771.6,1312.2)
-12: VD312.1 VD703.2 XP701.6 XP701.7 | length 6050
  Top Layer w19.7: VD703.2@196.7,5514.5 155,5514.5 126,5485.5 126,5375.2 145.7,5355.5 330.8,5355.5 433.8,5458.6 XP701.6@673.2,5458.6 XP701.7@673.2,5558.6
  Supply w19.7: XP701.7@673.2,5558.6 686.7,5572 1535.4,5572 1963.9,6000.5 1967.8,6000.5 2507.9,6540.5 4181.1,6540.5 4429.1,6292.5 4429.1,5863.4 4472.4,5820.1 4472.4,5614.9 VD312.1@4541.7,5545.5
  Supply w39.4: XP701.6@673.2,5458.6 XP701.7@673.2,5558.6
-15: C727.2 C728.2 C729.2 C730.2 C731.2 C732.2 C733.2 C734.2 C735.2 C736.2 DA204.4 DA205.13 DA206.4 DA207.4 DA502.4 DA503.4 DA504.4 DA505.4 DA602.4 DA603.4 DA604.5 DA606.4 DA607.4 DA608.4 DA609.4 DA610.4 DA611.4 DA612.4 DA613.4 DA701.4 VD707.2 XP702.6 | length 27220.6
  Top Layer w10: v1(6032.9,5085.4) DA205.13@6091.8,5085.4 ; DA604.5@8533.5,5457.8 8533.5,5414.8 v1(8545.3,5403)
  Top Layer w19.7: v2(6244.8,4283.4) DA207.4@6307.3,4283.4 ; DA206.4@6308.5,4569.3 6309.6,4568.1 v2(6370.1,4568.1) ; DA204.4@6678.7,4884.2 v2@6740.3,4884.2 ; DA611.4@7054.5,893.6 7054.5,951.7 v2(7063.4,960.6) ; DA607.4@7302.6,314.6 7367.9,314.6 v2(7379,325.6) ; v2(7378.3,912.6) 7409.2,912.6 DA610.4@7428.5,893.3 ; v2@8149.7,6312.5 DA701.4@8149.9,6376.6 ; v2(8210.6,5682.4) 8242,5651 DA603.4@8242,5650 ; v2(8602.3,268.9) 8658.4,268.9 DA606.4@8659.6,267.6 ; v2(10114,2300.5) DA502.4@10161.2,2300.5 ; v2(10488.4,2824.1) DA504.4@10488.4,2887.1 ; v2(10852.9,2964.6) 10860.8,2956.8 DA505.4@10860.8,2885.9 ; DA613.4@10869.9,5543.6 10870.1,5543.8 v2(10870.1,5599.6) ; v2(10988.2,2367.3) 10990.7,2364.8 DA503.4@10990.7,2291.4 ; DA612.4@11316.3,5303.2 11379.3,5303.2 v2(11391.1,5291.4)
  Top Layer w39.4: C727.2@8715.8,5426.7 8715.8,5584.1 8715.8,5662.9 8715.8,6262.5 8761.9,6308.6 8763.9,6310.6 VD707.2@8763.9,6464.1
  Supply w19.7: v1(6032.9,5085.4) 6032.9,5035.2 6074.8,4993.3 6480.3,4993.3 6589.4,4884.2 6592.6,4884.2 ; v2(6244.8,4283.4) 6370.1,4408.7 v2(6370.1,4568.1) 6370.1,4661.7 6592.6,4884.2 ; v2(6740.1,4884.2) 6592.6,4884.2 ; v2(7379,325.6) 7572.1,325.6 7624.4,378 8493.3,378 v2(8602.3,268.9) ; v2(7575.6,6202) 8039.1,6202 v2(8149.6,6312.5) v2(8209.7,6312.5) XP702.6@8757.9,6312.5 ; v2(8210.6,5682.4) v2(8210.6,6041.5) 8317.9,6041.5 8862.2,5497.2 8862.2,4666.5 8779.4,4583.8 DA602.4@8764.2,4583.8 ; XP702.6@8761.8,6308.6 8761.8,5826 9035.4,5552.4 9035.4,5418.5 ; DA608.4@9346.3,483.5 9346.3,426.5 9401.6,371.3 9708.6,371.3 9759.7,422.3 DA609.4@9759.7,483.5 9759.7,686.1 9787.4,713.8 v2(9787.4,772.8) ; v2(10114.2,1876.3) 10114.2,2457.9 9992.1,2579.9 9992.1,2824.2 ; v2(10747.2,5715.3) 10222,5715.3 9925.2,5418.5 9035.4,5418.5 ; v2(10852.9,2964.6) 10628.9,2964.6 v2(10488.4,2824.1) 9992.2,2824.1 9992.1,2824.2 ; v2(10870.1,5599.6) 10870.1,5383.8 10939,5314.9 11367.6,5314.9 v2(11391.1,5291.4) 11456.7,5225.9 11456.7,3127.2 10940.9,2611.4 10940.9,2520.9 10988.2,2473.6 v2(10988.2,2367.3) ; 9035.4,5418.5 9035.4,4863.4 9102.3,4796.4 9531.5,4796.4 9992.1,4335.8 9992.1,2824.2
  GND w19.7: v2(6740.1,4884.2) 7347.6,4884.2 7575.6,5112.2 v2(7575.6,6202) ; v2(8209.7,6312.5) 8210.6,6311.6 v2(8210.6,6041.5) ; v2(8602.3,268.9) 9131.7,268.9 DA608.4@9346.3,483.5 ; v2(9787.4,772.8) 9787.4,1119.3 10114.2,1446.1 v2(10114.2,1876.3) ; v2(10747.2,5715.3) 10754.3,5715.3 v2(10870.1,5599.6)
  Bottom Layer w19.7: v2(7063.4,960.6) 7330.3,960.6 v2(7378.3,912.6) 7379,912 v2(7379,325.6) ; v2(8210.6,5682.4) 8210.6,5589.7 8377.9,5422.4 8525.9,5422.4 v1(8545.3,5403)
-55: C303.2 C311.1 C510.1 C609.1 C702.2 DA301.4 pad.6@4366.6,5361.3 R309.1 R310.1 R331.2 R516.1 R517.1 R618.1 R619.1 VD313.2 VD502.2 VD704.2 VT316.3 VT502.2 VT502.4 VT602.2 VT602.4 XP701.8 | length 27581.8
  Top Layer w19.7: VD704.2@196.7,5695.6 196.7,5729.4 224.5,5757.1 405.6,5757.1 476.3,5686.4 C702.2@476.3,5658.2 ; VT502.4@9151.3,1056.6 9151.3,936.8 C510.1@9153.6,934.6 ; VT602.4@9219.3,4525.1 9219.3,4611.7 ; C609.1@9220.5,4643.2 9219.3,4642 9219.3,4611.7 ; R618.1@9318.9,4883.4 R619.1@9318.9,4611.7 9219.3,4611.7
  Top Layer w39.4: C702.2@476.2,5658.2 XP701.8@673.2,5658.6 ; C303.2@3486.4,3844 DA301.4@3486.4,3933.9 ; C311.1@3545.4,4662.9 3548.7,4666.1 3548.7,4745 3548.7,4890.6 v2(3588,4930) ; R309.1@3910.9,5166.2 v2@3973.9,5166.2 ; VD313.2@4366.2,5460.3 4366.6,5459.8 pad.6@4366.6,5361.3 ; R331.2@5232.3,5427.5 5233.9,5429 VT316.3@5233.9,5537.5 ; VT602.2@8985.4,4525.1 v2(9108.3,4525.1) VT602.4@9219.3,4525.1 ; VT502.4@9151.3,1056.6 v2(9267,1056.6) VT502.2@9376.3,1056.6 ; v2(10141.7,1291.7) R516.1@10216.5,1291.7 ; R517.1@10566.9,1194.4 v2(10566.9,1252.3)
  Supply w39.4: XP701.8@673.2,5658.6 1496,5658.6 2456.7,6619.3 4224.4,6619.3 ; pad.6@4366.1,5361.3 4549.1,5361.3 4645.7,5457.9 4645.7,5772.8 4512,5906.5 4512,6331.7 4224.4,6619.3 ; VT316.3@5233.9,5537.5 5358.3,5661.9 5358.3,6123.2 ; VD502.2@7122,3182.3 7043.3,3261 7043.3,3639 7137.8,3733.5 7137.8,5150.8 6343.3,5945.2 6343.3,6123.2 ; v2(9108.3,4525.1) 9688.7,4525.1 9909.4,4304.3 9909.4,2536.6 10027.5,2418.5 10027.5,1405.9 v2(10141.7,1291.7) ; v2@9109.1,4525.9 8952.7,4682.3 8952.7,5520.9 8350.4,6123.2 6343.3,6123.2 ; v2(9267,1056.6) 9906.6,1056.6 v2(10141.7,1291.7) ; v2(10566.9,1252.3) 10566.9,1253.1 10528.3,1291.7 v2(10141.7,1291.7) ; 4224.4,6619.3 4862.2,6619.3 5358.3,6123.2 ; 5358.3,6123.2 6343.3,6123.2
  Bottom Layer w39.4: DA301.4@3486.4,3933.9 3486.4,3971.8 3527.6,4013 4094.5,4013 4216.5,4135 4216.5,5159 4149.6,5225.9 ; v2(3588,4930) 3824.2,5166.2 v2(3973.8,5166.2) ; v2@3973.9,5166.2 4033.5,5225.9 4149.6,5225.9 ; VT316.3@5233.9,5537.5 5233.9,5440.9 5154.4,5361.3 pad.6@4366.6,5361.3 4285,5361.3 4149.6,5225.9
-U: DD114.76 R319.1 | length 9910.5
  Top Layer w10: R319.1@4943.6,4937.1 4944.9,4935.8 v1(4944.9,4879.1) ; v1@10771.7,1355.5 11074.8,1355.5 11102.1,1328.3 DD114.76@11153.6,1328.3
  Bottom Layer w10: v1(4944.9,4879.1) 4952.8,4871.2 4952.8,3761 5107.5,3606.3 6798,3606.3 7002.3,3810.6 9355.9,3810.6 9580.3,3586.2 9580.3,2964.2 9339,2722.8 9339,2079.5 9595.3,1823.2 10524.4,1823.2 10713.8,1633.9 10713.8,1413.4 v1(10771.6,1355.5)
ADC: DA612.2 DA612.15 R221.2 | length 3509.2
  Top Layer w19.7: R221.2@10540.4,3660.8 10540.4,3603.8 10446,3509.4 10028.7,3509.4 9920.5,3617.7 9920.5,4805.5 10032.3,4917.3 10607.9,4917.3 10893.8,5203.2 DA612.15@11100.9,5203.2 ; DA612.15@11101,5203.3 DA612.2@11316.4,5203.3
AZ: DA503.8 DA503.9 DD114.50 | length 1699.2
  Top Layer w10: DA503.8@11190.8,2291.4 11190.8,2190.3 11242.5,2138.6 11651.6,2138.6 11799.6,1990.5 11799.6,1346.7 11785.6,1332.6 11764.2,1332.6 DD114.50@11759.9,1328.3
  Top Layer w19.7: DA503.8@11190.8,2291.4 DA503.9@11190.8,2506.8
C: DA605.5 DD102.3 DD114.31 | length 8871.9
  Top Layer w10: DA605.5@6662.6,1006.8 6662.6,1046.9 6799.6,1183.9 6955.1,1183.9 v2(6956.3,1185) ; DD114.31@11759.9,954.2 11992.2,954.2 12015.8,977.9 12015.8,2178.7 12086.7,2249.5 12271.7,2249.5 12330.2,2191 DD102.3@12330.2,2090.1
  Bottom Layer w10: v2(6956.3,1185) 7020.9,1185 7058.6,1222.8 7685.4,1222.8 8038.7,869.5 9015.5,869.5 9099.4,785.7 9373.1,785.7 9408.2,820.9 9613.8,820.9 9670.5,877.6 10576.7,877.6 10725.3,729 10978.2,729 11126.7,877.6 11126.7,1338.2 11192.1,1403.5 11192.1,1485.8 11233.8,1527.6 11394.1,1527.6 11736.5,1870 11944.9,1870 12157.1,2082.2 12157.1,2244.8 v1(12162.2,2249.9)
C206_2: C206.2 DA204.2 DA204.7 DA204.10 DA205.2 | length 839.7
  Top Layer w10: DA205.2@6317.5,5034.2 DA204.10@6463.1,5034.2
  Top Layer w19.7: DA204.10@6463.3,5034.2 6544.5,5034.2 6586.8,4991.9 ; C206.2@6610.4,5153.3 6610.4,5117.9 6586.8,5094.3 6586.8,4991.9 ; DA204.2@6678.7,4784.2 6633,4784.2 6586.8,4830.5 6586.8,4991.9 ; DA204.7@6678.7,5034.2 6629.1,5034.2 6586.8,4991.9
C221_2: C221.2 DA211.2 R229.2 | length 298.8
  Top Layer w10: DA211.2@11120.2,4075.1 11167.4,4075.1 11250,3992.4 C221.2@11250,3949.1 ; 11167.4,4075.2 11179.2,4086.9 R229.2@11179.2,4161.7
C302_1: C302.1 DA301.5 KT301.1 R304.2 | length 560.3
  Top Layer w39.4: DA301.5@3536.5,4095.4 3536.1,4189.1 3538,4191 R304.2@3618.3,4191 3619.5,4189.9 4001.3,4189.9 KT301.1@4001.4,4189.8
C306_1: C306.1 DA301.6 | length 167.4
  Top Layer w39.4: DA301.6@3586.5,3933.9 3702.6,3933.9 C306.1@3738.8,3970.2
C306_2: C306.2 DA301.7 | length 121.6
  Top Layer w39.4: DA301.7@3636.5,4095.4 3692.4,4095.4 C306.2@3738.8,4048.9
C312_2: C312.2 R325.1 | length 82.7
  Top Layer w39.4: R325.1@3429.2,6076.3 C312.2@3511.9,6076.3
C313_2: C313.2 R321.2 R322.2 VT312.1 | length 640.7
  Top Layer w39.4: R322.2@2787.5,5994.4 2708.7,5994.4 2665.4,5951.1 R321.2@2519.8,5951.1 ; R321.2@2519.8,5951.1 2435.5,6035.3 2435.5,6075.4 2433.1,6073 C313.2@2433.1,5978.6 2492.2,5978.6 R321.2@2519.8,5951.1
C314_1: C314.1 C317.2 C318.1 pad.5@4078,5352.6 pad.7@4366.1,5763.8 VD311.2 VD312.3 VD313.1 VT310.4 VT313.3 VT314.2 VT314.4 VT316.2 | length 3036.3
  Top Layer w39.4: VD311.2@3979,5352.6 pad.5@4078,5352.6 4078,5694.4 C317.2@4141.7,5758.1 4363,5758.1 pad.7@4366.1,5761.3 ; pad.7@4366.2,5763.8 VD313.1@4366.2,5662.3 4682.5,5662.3 4741.8,5603.1 ; 4557.3,5889.9 v2(4557.3,5955) ; 4557.4,5890 4730.3,5890 4759.9,5919.6 C314.1@4759.9,5982.6 4808.7,6031.4 VT313.3@4808.7,6075.4 ; VD312.3@4741.8,5545.6 4741.8,5603.1 ; VT314.4@5133.9,5040.3 VT314.2@5133.9,5263.5 VT316.2@5133.9,5537.9 5133.9,5612.5 5102.4,5644 4782.7,5644 4741.8,5603.1
  Bottom Layer w39.4: pad.7@4366.1,5763.8 v2(4557.3,5955)
C403_1: C403.1 K412.8 R404.1 | length 1035.6
  Top Layer w39.4: K412.8@6240.6,2480.7 6240.6,1898.8 6240.6,1717.3 C403.1@6433.1,1524.83
C503_1: C503.1 P502.2 P506.2 R504.1 | length 590.9
  Top Layer w19.7: P506.2@7748.1,1481.8 7984.3,1481.8 v2@8004,1462.1 ; R504.1@8118.1,1312.5 C503.1@8118.1,1395.2 v2(8118.1,1462.1) P502.2@8118.1,1525.1
  Bottom Layer w19.7: v2(8003.9,1462.1) v2(8118.1,1462.1)
C507_1: C507.1 K502.8 | length 325.5
  Top Layer w39.4: K502.8@9252.6,2844.4 9303.8,2844.4 9473.5,3014 C507.1@9473.5,3048.4
C519_1: C519.1 R529.1 R530.2 | length 157.5
  Top Layer w19.7: R529.1@10559.1,3033 10641.8,3033 C519.1@10641.8,3107.8
C608_1: C608.1 DA601.4 R612.2 VD601.2 | length 621.2
  Top Layer w19.7: v1@8204.8,4336.1 8204.8,4261.3 8244.1,4221.9 C608.1@8244.1,4190.4 8244.1,4135 VD601.2@8267.4,4111.7 8322.5,4056.6 R612.2@8327.7,4056.6 ; DA601.4@8313.9,4411.1 8342.8,4411.1 8366.2,4434.6 v1@8366.2,4446.4
  Bottom Layer w19.7: v1(8204.7,4336.1) 8267.7,4336.1 8366.1,4434.5 v1@8366.1,4446.3
  other v1: 8366.1,4446.4
C610_2: C610.2 R614.1 VD602.2 VD603.1 | length 538.4
  Top Layer w19.7: C610.2@8622.1,4155 8621.3,4245.6 8744.1,4245.6 8786.1,4287.5 8786.1,4340.1 8786.1,4448.9 8825.4,4488.3 VD603.1@8874,4488.3
C615_1: C615.1 DA607.3 R629.2 R630.1 | length 259.2
  Top Layer w19.7: R629.2@7050.4,347.9 7133.1,347.9 7214.5,347.9 C615.1@7214.9,348.4 7231.1,364.6 DA607.3@7302.6,364.6
C617_2: C617.2 DA607.6 R636.2 R638.2 | length 411.6
  Top Layer w19.7: R638.2@7462.1,543.1 7447.2,528.2 7447.2,397.4 7480.1,364.5 DA607.6@7520.9,364.5 ; DA607.6@7520.9,364.6 7594.2,364.6 R636.2@7608.6,350.2 C617.2@7687.3,350.2
C628_1: C628.1 DA613.3 R653.2 | length 201.2
  Top Layer w19.7: DA613.3@10919.9,5543.6 10919.9,5660.2 10921.3,5661.5 C628.1@11004,5661.5
C629_1: C629.1 DA613.2 R649.1 R650.2 | length 421
  Top Layer w19.7: R649.1@10625.2,5480.4 10626.5,5481.7 C629.1@10704.9,5481.7 10723.7,5500.6 10791.5,5500.6 10802.7,5500.6 10830.7,5472.6 10944.9,5472.6 10969.9,5497.6 DA613.2@10969.9,5543.6
C630_2: C630.2 R603.1 | length 78.8
  Top Layer w19.7: C630.2@7444.9,4379.4 R603.1@7523.7,4379.4
C631_2: C631.2 R605.1 | length 91.7
  Top Layer w19.7: R605.1@7846.4,4300.7 7877.9,4269.2 C631.2@7877.9,4222
CA: DA212.1 DA212.2 DD107.3 | length 1164.9
  Top Layer w10: DA212.2@11826.4,4144.8 11826.4,4093.2 11833.9,4085.7 11851.6,4085.7 ; DA212.1@11876.4,4144.8 11876.4,4092.8 11869.3,4085.7 11851.6,4085.7 ; DD107.3@12330.6,4302.7 12330.6,4422.1 12289.1,4463.7 12109.3,4463.7 12056.3,4410.7 12056.3,4075.6 12033.4,4052.7 11868.6,4052.7 11851.6,4069.7 11851.6,4085.7
CLBR: DD114.67 R154.1 | length 3637.4
  Top Layer w10: R154.1@9087.7,2516.9 9087.7,2520.1 9098.7,2531.1 9267.4,2531.1 9340.1,2458.3 9340.1,2065.7 9483.2,1922.7 10510.5,1922.7 10542.1,1954.3 11031.5,1954.3 11072.8,1913 11557.1,1913 11581.9,1888.2 11581.9,1672.8 11520.6,1611.6 11460.6,1611.6 11377.6,1528.6 11377.6,1395.6 DD114.67@11378,1395.2
CLK1_DAC_N: DD102.13 pad.5@12671.2,2181.5 R103.2 XP101.5 | length 1031.7
  Top Layer w10: DD102.13@12381.1,2464 12381.1,2391.8 12395.5,2377.4 12395.5,2334.1 12462.4,2267.2 12640.7,2267.2 12670.2,2237.7 12671.2,2236.6 pad.5@12671.2,2181.5 ; R103.2@12670.4,2237.7 12736.3,2237.7 ; 12736.2,2237.7 12748,2225.9 12748,2080.2 12874,1954.2 XP101.5@12992.1,1954.2